# Altium PCB PCM2706_CODEC.PcbDoc
Units mil, origin at the board's own origin, x right, y up, seen from the top; angles counter-clockwise.
Board outline 1377.95 x 1377.95 mil, 2 copper layers (Top Layer, Bottom Layer); 33 components, 23 nets, 108 pads, 24 vias.
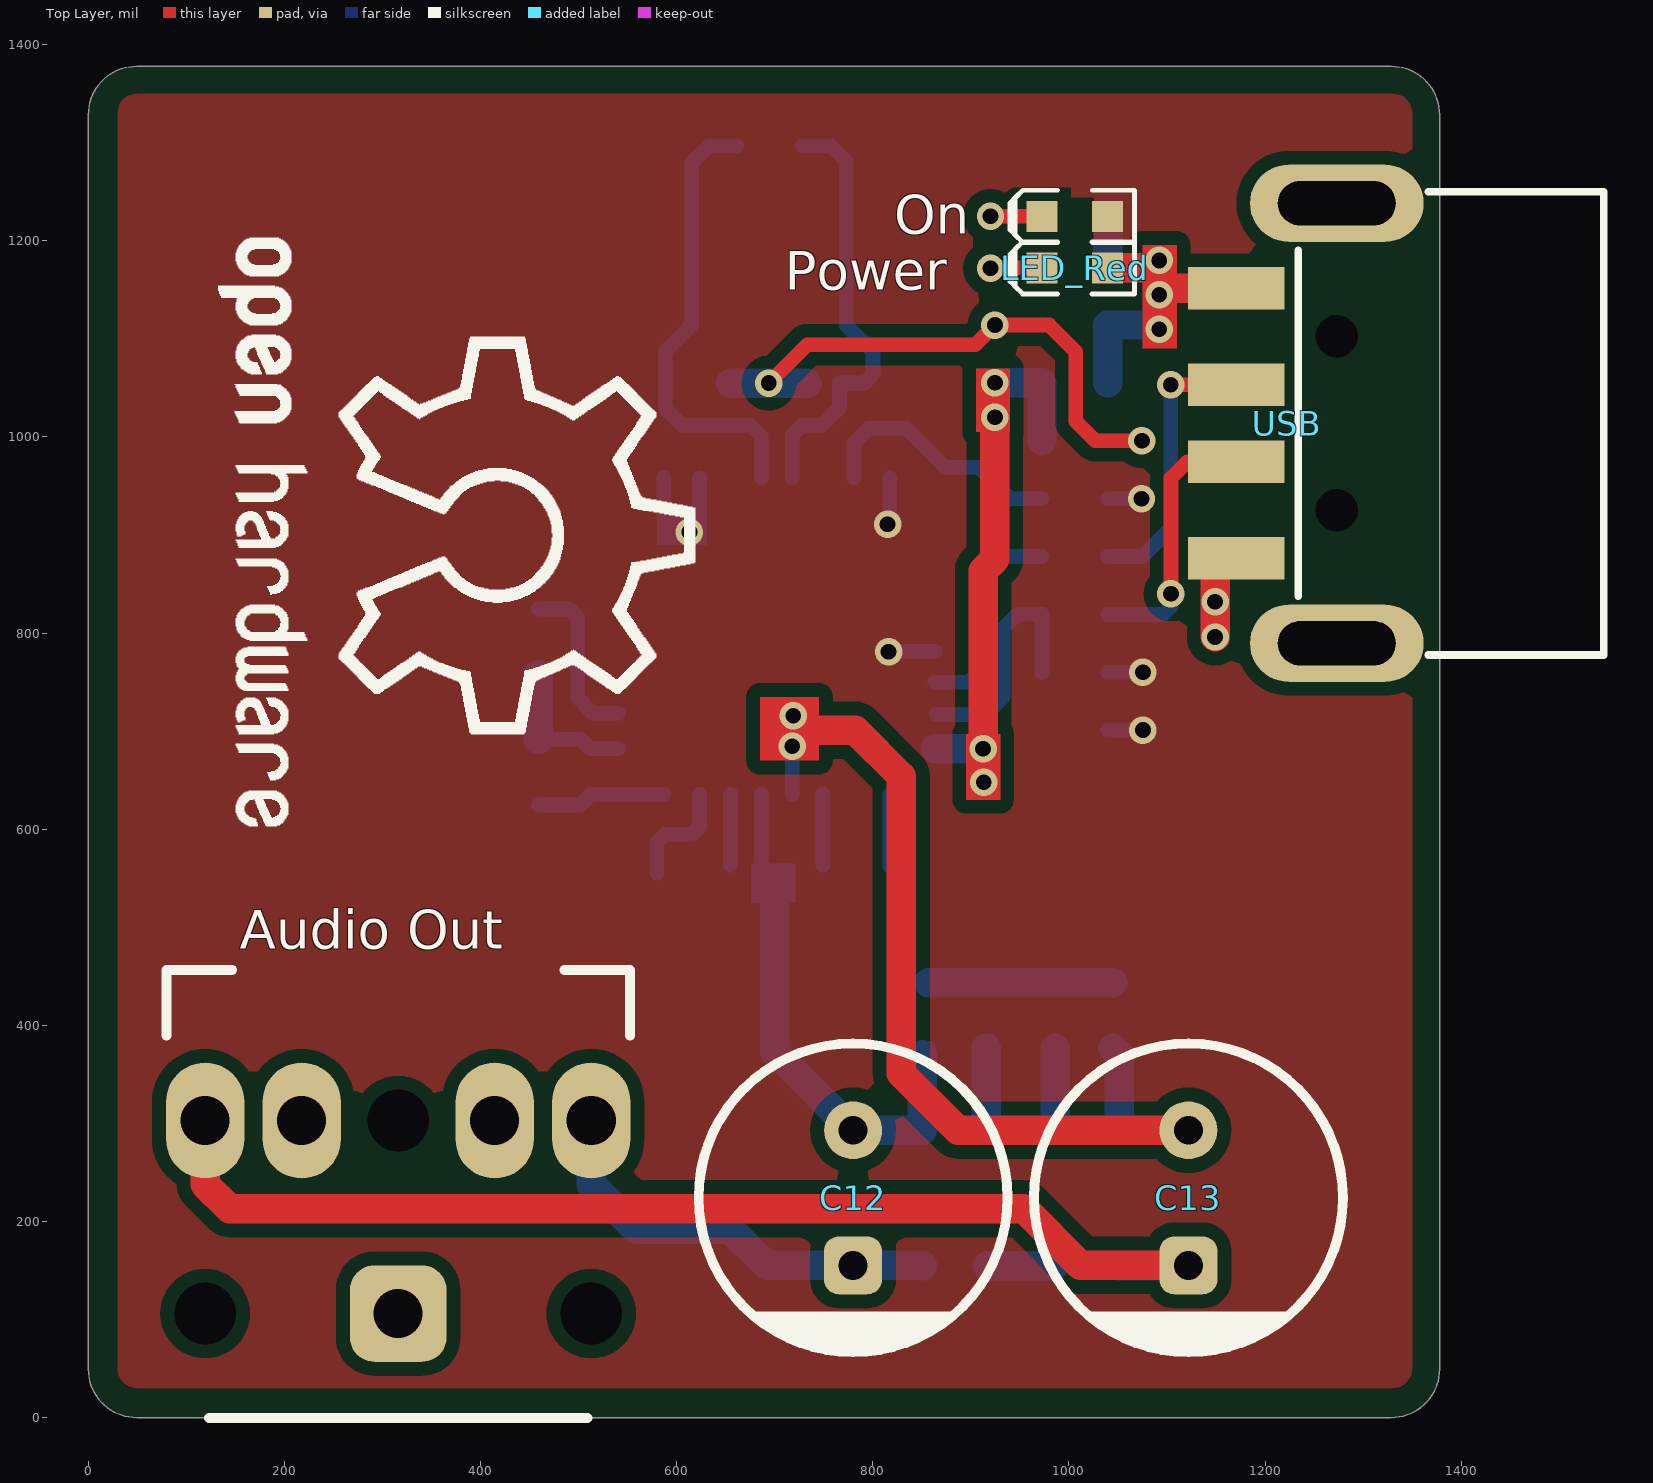
[diagram p0: Top Layer view]
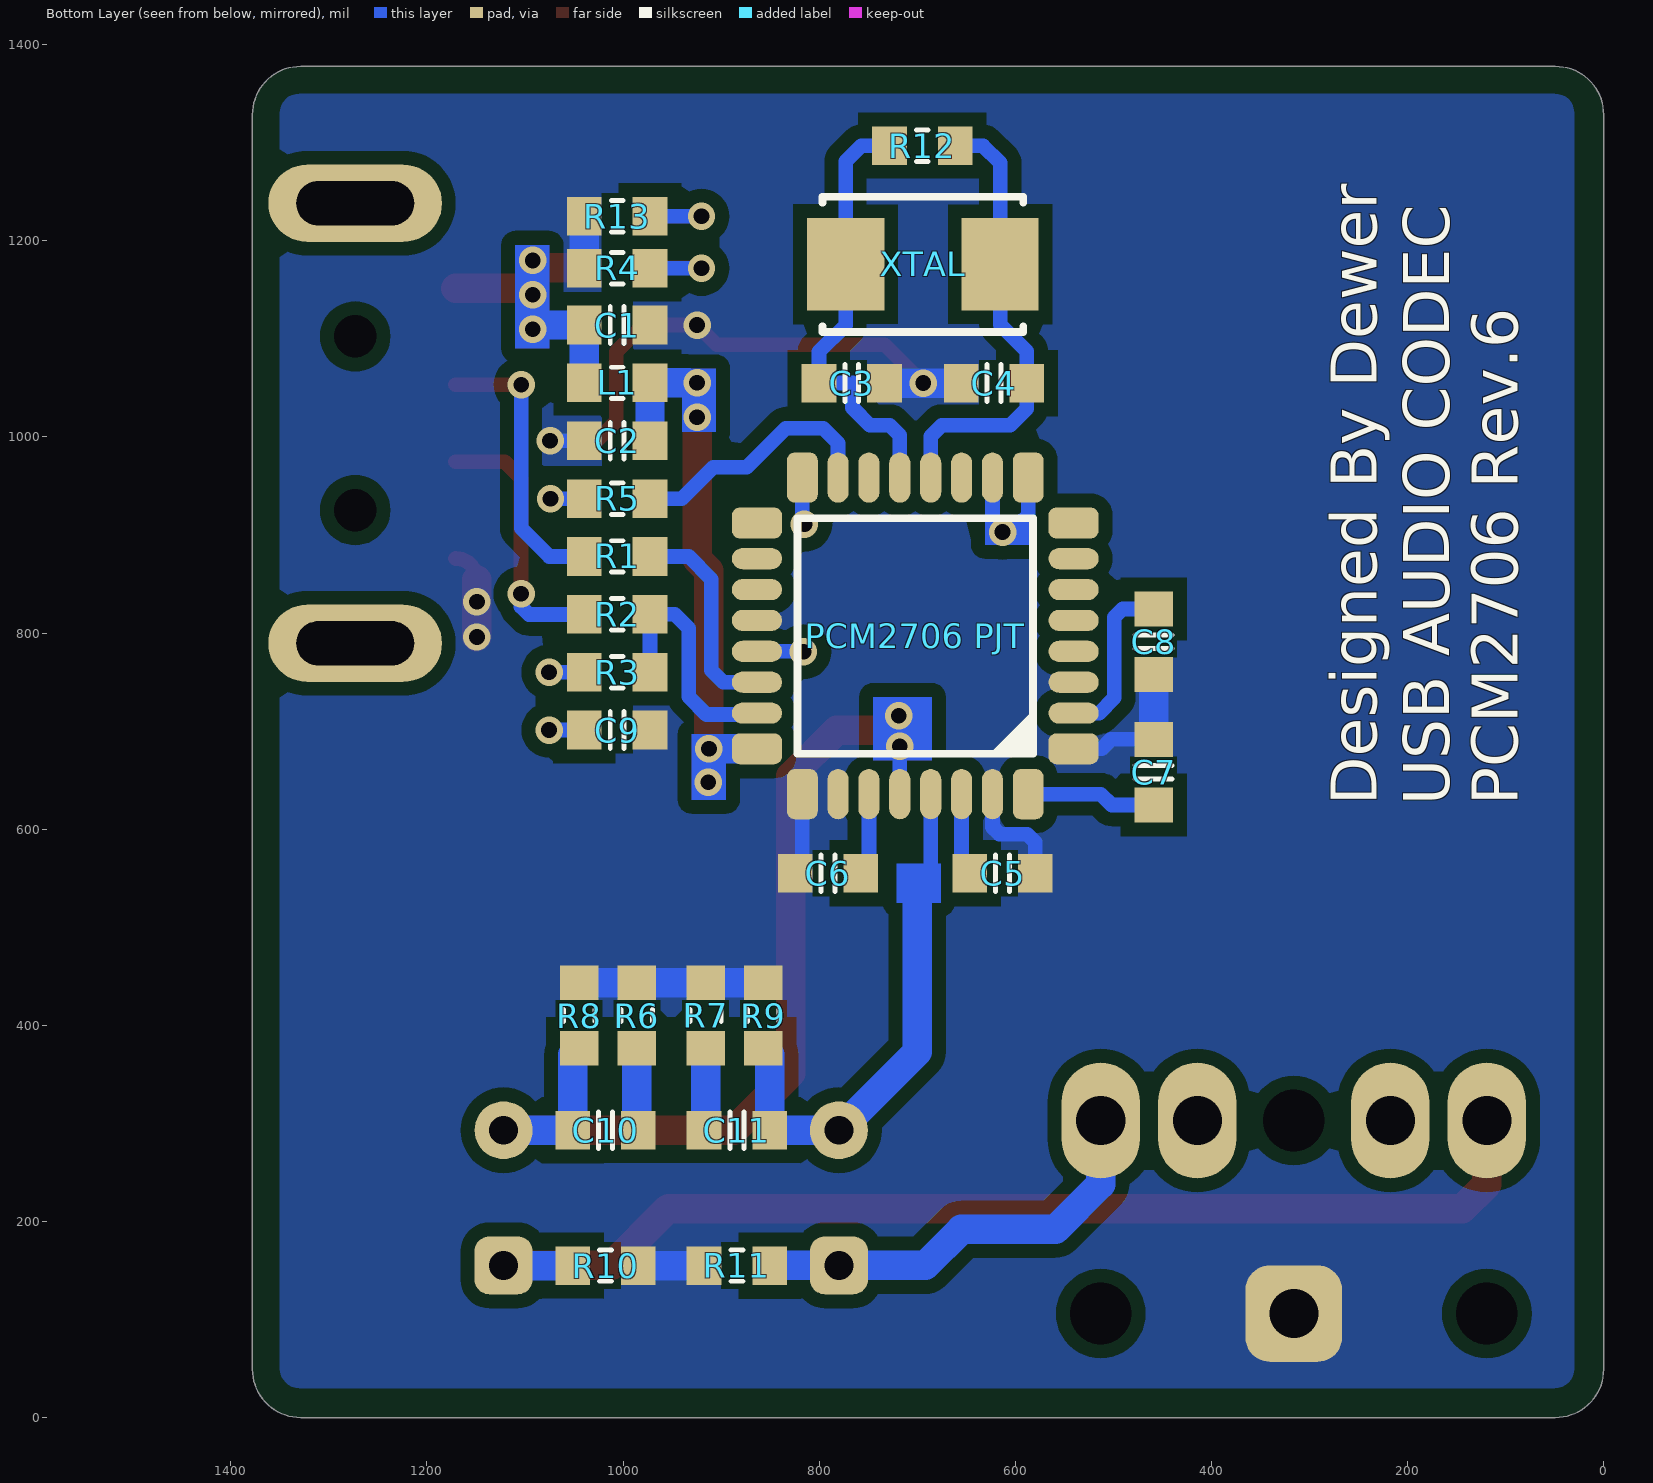
[diagram p1: Bottom Layer view, seen from below]

## Layer stack, top to bottom
Top Layer: signal copper 1.4
Dielectric: dielectric 12.6, FR-4, Dk 4.8
Bottom Layer: signal copper 1.4

## Board outline
1377.95,1328.74 ccw(c1328.74,1328.74) 1328.74,1377.95 49.21,1377.95 ccw(c49.21,1328.74) 0,1328.74 0,49.21 ccw(c49.21,49.21) 49.21,0 1328.74,0 ccw(c1328.74,49.21) 1377.95,49.21

## Design rules (kind name [scope] priority, off if disabled: settings)
Clearance [All] p1: gap=7
PlaneConnect [All] p1: planeconnectstyle=Relief reliefexpansion=10 reliefentries=4 reliefconductorwidth=10 reliefairgap=15
PolygonConnect [All] p1: connectstyle=Direct reliefconductorwidth=10 reliefentries=4 polygonreliefangle="90 Angle" airgapwidth=10
RoutingVias [All] p1: holewidth=28 width=50 viastyle="Through Hole" minholewidth=28 minwidth=50 maxholewidth=28 maxwidth=50
SolderMaskExpansion [All] p1: expansion=0
Width [All] p1: maxlimit=40 minlimit=10 preferedwidth=20 minimp=50.000000 maximp=50.000000 favimp=50.000000
27 further rules are at their usual default settings.

## Components (designator, comment, footprint, x,y, rotation, side; value= is the part's Value field where it differs from the comment)
"Audio Out" "Generic 3.5 PhoneJack 5 Pin through-hole" "3.5 PHONEJACK 5 PIN" 316,106 r270 top (schematic designator J_Audio_Out)
C1 "Cap_0603" CAP_0603 1006,1114.14 r0 bottom
C2 "Cap_0603" CAP_0603 1006,996.14 r180 bottom
C3 "Cap_0603" CAP_0603 766.75,1054.96 r0 bottom
C4 "Cap_0603" CAP_0603 621.75,1054.96 r180 bottom
C5 "1uF" CAP_0603 613,555.14 r0 bottom
C6 "1uF" CAP_0603 791,555.14 r180 bottom
C7 "10uF" CAP_0603 459,658.14 r270 bottom
C8 "1uF" CAP_0603 459,791.14 r270 bottom
C9 "1uF" CAP_0603 1006,701.14 r0 bottom
C10 "0.022uF" CAP_0603 1017.86,293 r0 bottom
C11 "0.022uF" CAP_0603 883.86,293 r180 bottom
C12 "270uF" CAP_ELEC_F3.5_D8_H11.5 779.86,293 r270 top
C13 "270uF" CAP_ELEC_F3.5_D8_H11.5 1121.86,293 r270 top
L1 "Ind_0603" IND_0603 1006,1055.14 r180 bottom
LED_Red "LED_0603_RED" LED_0603_RED 1005.9,1172.44 r180 top
On "LED_0603_RED" LED_0603_RED 1006,1225 r180 top (schematic designator LED_Green)
"PCM2706 PJT" "PCM2706 PJT" TI-S-PQFP-N32 702,797.14 r0 bottom
R1 "Res_0603" RES_0603 1006,878.14 r180 bottom
R2 "Res_0603" RES_0603 1006,819.14 r180 bottom
R3 "Res_0603" RES_0603 1006,760.14 r180 bottom
R4 "1k" RES_0603 1006,1172.14 r0 bottom
R5 "1.5K" RES_0603 1006,937 r180 bottom
R6 "16" RES_0603 985.86,410 r90 bottom
R7 "16" RES_0603 915.86,410 r90 bottom
R8 "3.3K" RES_0603 1044.86,410 r90 bottom
R9 "3.3K" RES_0603 856.86,410 r90 bottom
R10 "3.3K" RES_0603 1017.86,155 r180 bottom
R11 "3.3K" RES_0603 883.86,155 r0 bottom
R12 "Res_0603" RES_0603 694.75,1296.96 r180 bottom
R13 "1k" RES_0603 1006,1225 r0 bottom
USB "USB" USB 1379.45,1013.95 r0 top
XTAL "XTAL_5032" XTAL_5032 694.21,1175.96 r0 bottom

## Footprints (in the part's own frame and the unit in brackets; to place one, negate y for a bottom-side part, rotate by r counter-clockwise, add the part's x,y. Pads: shape width x height; smd on the part's side, far side on the other; paste and mask are expansions set on the pad)
"3.5 PHONEJACK 5 PIN" [mm] "Generic 3.5 PhoneJack 5 Pin  through-hole"
  round 1 hole 1.6: 0(-5,0) 0(0,5) 0(0,-5)
  oval 3x2.032 hole 1.27: Ring_NC(-5,-2.5) Ring_NO(-5,-5) Tip_NC(-5,2.5) Tip_NO(-5,5)
  rrect50% 2.5x2.5 hole 1.27: Sleeve(0,0)
  silkscreen extent -8.9,-6 2.7,6, body extent -8.48,-6 6.52,6, height 10
CAP_0603 [mm] "Chip Capacitor, Body 1.6x0.8mm, 0603, IPC Medium Density"
  rect 0.9x1 smd: 1(-0.85,0) 2(0.85,0)
  Top Layer pour cut-out: -0.4,0.6 0.4,0.6 0.4,-0.6 -0.4,-0.6
  silkscreen extent -0.18,-0.48 0.18,0.48, body extent -0.85,-0.45 0.85,0.45, height 0.89
CAP_ELEC_F3.5_D8_H11.5 [mm] "CAP_ELEC_F3.5_D8_H11.5"
  round 1.5 hole 0.75: 1(0,0)
  rrect50% 1.5x1.5 hole 0.75: 2(3.5,0)
  silkscreen extent -2.25,-4 5.75,4, body extent -2.27,-4.03 5.78,4.03, height 12.03
IND_0603 [mm] "Chip bead, Body 1.6x0.8mm, 0603, IPC Medium Density"
  rect 0.9x1 smd: 1(-0.85,0) 2(0.85,0)
  Top Layer pour cut-out: -0.4,0.6 0.4,0.6 0.4,-0.6 -0.4,-0.6
  silkscreen extent -0.15,-0.41 0.15,0.41, body extent -0.8,-0.4 0.8,0.4, height 0.79
LED_0603_RED [mm] "Chip Capacitor, 2-Leads, Body 1.6x0.8mm, IPC Medium Density"
  rect 0.8x0.8 smd: 1(-0.85,0) 2(0.85,0)
  Top Layer pour cut-out: -0.5,0.5 0.5,0.5 0.5,-0.5 -0.5,-0.5
  silkscreen extent -1.55,-0.67 1.68,0.67, body extent -0.8,-0.4 0.8,0.4, height 0.75
RES_0603 [mm]
  rect 0.9x1 smd: 1(-0.85,0) 2(0.85,0)
  Top Layer pour cut-out: -0.4,0.6 0.4,0.6 0.4,-0.6 -0.4,-0.6
  silkscreen extent -0.15,-0.41 0.15,0.41, body extent -0.87,-0.47 0.88,0.48, height 0.54
TI-S-PQFP-N32 [mm] "TQFP, 32-Leads, Body 7.00x7.00mm, Pitch 0.80mm, IPC High Density"
  rrect50% 1.3x0.8 smd: 1(-4.1,2.925) 8(-4.1,-2.925) 17(4.1,-2.925) 24(4.1,2.925)
  oval 1.3x0.55 smd: 2(-4.1,2) 3(-4.1,1.2) 4(-4.1,0.4) 5(-4.1,-0.4) 6(-4.1,-1.2) 7(-4.1,-2) 18(4.1,-2) 19(4.1,-1.2) 20(4.1,-0.4) 21(4.1,0.4) 22(4.1,1.2) 23(4.1,2)
  rrect50% 0.8x1.3 smd: 9(-2.925,-4.1) 16(2.925,-4.1) 25(2.925,4.1) 32(-2.925,4.1)
  oval 0.55x1.3 smd: 10(-2,-4.1) 11(-1.2,-4.1) 12(-0.4,-4.1) 13(0.4,-4.1) 14(1.2,-4.1) 15(2,-4.1) 26(2,4.1) 27(1.2,4.1) 28(0.4,4.1) 29(-0.4,4.1) 30(-1.2,4.1) 31(-2,4.1)
  silkscreen extent -3.05,-3.05 3.05,3.05, body extent -4.51,-4.5 4.49,4.5, height 1.6
USB [mm] "Connector; USB1.1, Type A, SM; 4 Position; Right Angle"
  round 0.8 hole 1.1: 0(-2.7,-2.25) 0(-2.7,2.25)
  rect 2.5x1.1 smd: 1(-5.3,3.5) 2(-5.3,1) 3(-5.3,-1) 4(-5.3,-3.5)
  oval 4.5x2 hole 1.143 slot 3.048 at 0 deg: 5(-2.7,-5.7) 6(-2.7,5.7)
  silkscreen extent -3.7,-6 4.21,6, body extent -5.3,-6.3 15,6.31, height 3.15
XTAL_5032 [mm] "Molded Capacitor, 2-Leads, Body 5.0x3.2mm, IPC Medium Density"
  rect 2x2.4 smd: 1(-2,0) 2(2,0)
  silkscreen extent -2.6,-1.75 2.6,1.75, body extent -2.5,-1.6 2.5,1.6, height 1

## Part data
C1 C2 C3 C4: "Capacitor"
C5 C6 C7 C8 C9 C10 C11: library part Cap_0603, "Cap_0603"
C12 C13: library part Cap_ELEC_8*11.5*3.5, "Cap_ELEC_8*11.5*3.5"
L1: "Inductor"
LED_Red On: "LED"
"PCM2706 PJT": "PCM2706 USB CODEC"
R1 R2 R3 R12: "Resistor"
R4 R6 R7 R8 R9 R10 R11 R13: library part Res_0603, "Res_0603"
R5: library part Res_0603, "Resistor"
XTAL: "Crystal Oscillator"

## Via types
v1: diameter 28, hole 16, Top Layer to Bottom Layer, 23 vias
v2: diameter 28, hole 16, Top Layer to Bottom Layer, tented top, 1 vias

## Nets (pads, with @x,y where several pads share a name; then routed paths per layer and width w, separated by ;. In a path a pad name is that pad's centre, name@x,y a point inside that pad or via, vN(x,y) a via of type N, cw(c..) or ccw(c..) an arc to the next point about the centre after c; other vN are vias at no path point)
5V: C1.2 L1.1 LED_Red.1 USB.1 | length 233.7
  Top Layer w30: LED_Red.1 1084.44,1172.44 v1(1092,1180) ; v1@1100.25,1151.75 USB.1
  Bottom Layer w30: L1.1 C1.2 v1@1087.86,1114.14
  other v1: 1092,1110 1092,1145
AGND: "Audio Out.Sleeve" "PCM2706 PJT.1" "PCM2706 PJT.3" "PCM2706 PJT.20" "PCM2706 PJT.25" "PCM2706 PJT.26" "PCM2706 PJT.31" C1.1 C2.1 C3.1 C4.1 C5.1 C6.1 C7.1 C8.2 C9.1 R4.2 R6.2 R7.2 R8.2 R9.2 R10.2 R11.2 R13.2 USB.4 | length 1349.1
  Top Layer w15: v1(694,1054.96) 733.04,1094 904.39,1094 v1(924.54,1114.14) 979.86,1114.14 1007,1087 1007,1016 1026.86,996.14 v1(1074.46,996.14) ; 1149,854.37 cw(c1170.79,854.37) USB.4
  Top Layer w30: v1(1149,796) v1(1149,832) 1149,854.37
  Bottom Layer w15: C7.1 502.39,691.61 512.02,681.98 540.58,681.98 ; C5.1 579.54,586.54 588,595 616,595 623.26,602.26 623.26,635.72 ; C6.1@817.16,562.45 817.16,635.72 ; C2.1 v1(1074.46,996.14)
  Bottom Layer w30: C7.1 C8.2 ; C4.1 v1(694,1054.96) C3.1 ; R9.2 R7.2 R6.2 R8.2 ; R11.2 R10.2 ; R4.2 R13.2
D+: "PCM2706 PJT.23" R2.2 R3.2 | length 250
  Bottom Layer w15: 864.82,717 915,717 933,735 933,805 947.14,819.14 R2.2 R3.2
D-: "PCM2706 PJT.22" R1.2 | length 216.7
  Bottom Layer w15: 863.42,749.9 897.9,749.9 910,762 910,855 933.14,878.14 R1.2
DT: "PCM2706 PJT.15" R5.2 | length 263.1
  Bottom Layer w15: 780.74,958.56 780.74,993.74 796,1009 834,1009 874,969 908,969 940,937 R5.2
NetC10_1: C10.1 R6.1 | length 82.1
  Bottom Layer w30: C10.1@985.86,294.46 R6.1
NetC11_1: C11.1 R7.1 | length 82.1
  Bottom Layer w30: C11.1@915.86,294.46 R7.1
NetLED_Green_2: On.2 R13.1 | length 105.1
  Top Layer w15: v1(920,1225) On.2
  Bottom Layer w15: v1(920,1225) R13.1
NetLED_Red_2: LED_Red.2 R4.1 | length 104.4
  Top Layer w15: v1@920.44,1172.44 LED_Red.2
  Bottom Layer w15: v1@920.14,1172.14 R4.1
  other v1: 920,1172
NetR1_1: R1.1 USB.2 | length 289.7
  Top Layer w15: v1(1103.79,1053.32) USB.2
  Bottom Layer w15: R1.1 1075.14,878.14 1103.79,906.79 v1(1103.79,1053.32)
NetR2_1: R2.1 USB.3 | length 272.6
  Top Layer w15: v1(1104,840) 1104,958 1120.58,974.58 USB.3
  Bottom Layer w15: R2.1 1039.61,819 1096,819 1104,827 v1(1104,840)
PHONEL: "Audio Out.Ring_NO" C13.2 R10.1 | length 1172.6
  Top Layer w30: 119.15,302.85 119.15,237.85 144,213 954,213 1011.8,155.2 C13.2
  Bottom Layer w30: R10.1 1121.65,155 C13.2
PHONER: "Audio Out.Tip_NO" C12.2 R11.1 | length 436.7
  Bottom Layer w30: 512.85,302.85 512.85,238.15 559,192 655,192 691.8,155.2 C12.2 850.19,155.2 R11.1
VBUS: "PCM2706 PJT.24" C2.2 L1.2 | length 490.2
  Top Layer w30: v1(912.42,681.98) 912.42,863.42 924.54,875.54 v1(924.54,1020.14)
  Bottom Layer w30: 863.42,681.98 v1(912.42,681.98) ; v1@933.54,1055.14 L1.2 C2.2
  other v1: 924.54,1055.14
  other v2: 913,648
VCCL: "PCM2706 PJT.27" C6.2 | length 72.3
  Bottom Layer w15: C6.2@749.24,563.43 749.24,635.72
VCCP: "PCM2706 PJT.2" C8.1 | length 173.6
  Bottom Layer w15: C8.1 490.39,824.61 499,816 499,734 514.6,718.4 540.58,718.4
VCCR: "PCM2706 PJT.30" C5.2 | length 72.3
  Bottom Layer w15: C5.2@654.76,563.43 654.76,635.72
VCOM: "PCM2706 PJT.32" C7.2 | length 132.4
  Bottom Layer w15: C7.2 501.68,624.68 512.72,635.72 586.84,635.72
VDD: "PCM2706 PJT.9" "PCM2706 PJT.10" "PCM2706 PJT.16" "PCM2706 PJT.21" C9.2 On.1 R3.1 R5.1 | length 327
  Bottom Layer w15: 586.84,958.56 586.84,920.16 594.74,912.26 623.26,912.26 623.26,958.56 ; v1(815,911) 817.16,913.16 817.16,958.56 ; v1(816,781) 816.39,781.39 863.42,781.39 ; C9.2 v1(1075.46,701.14) ; R3.1 v1(1075.46,760.14) ; R5.1 v1(1074,937)
  other v1: 613,903
VOUTL: "PCM2706 PJT.28" C10.2 C13.1 R8.1 | length 956.1
  Top Layer w30: 713,701 782,701 829,654 829,351 887,293 C13.1
  Bottom Layer w15: 717.75,635.72 v1@717.75,679.75
  Bottom Layer w30: R8.1 1051.32,370.07 C10.2 C13.1
  other v1: 717.75,684.75 718.75,715.75
VOUTR: "PCM2706 PJT.29" C11.2 C12.1 R9.1 | length 541.6
  Bottom Layer w15: 686.25,535 686.25,635.72 ; R9.1@850.39,370.07 R9.1
  Bottom Layer w30: 700,544 700,372.86 C12.1 C11.2 R9.1@850.39,370.07
XTI: "PCM2706 PJT.12" C4.2 R12.2 XTAL.1 | length 466.8
  Bottom Layer w15: R12.2 632.96,1296.96 615.47,1279.47 XTAL.1 615.47,1114.47 588.28,1087.28 C4.2 588.28,1028.72 605,1012 675,1012 686.25,1000.75 686.25,958.56
XTO: "PCM2706 PJT.13" C3.2 R12.1 XTAL.2 | length 445.9
  Bottom Layer w15: 717.75,958.56 717.75,1001.75 728,1012 748.23,1012 766,1029.77 766,1054.96 791.19,1054.96 800.21,1063.98 800.21,1086.79 772.95,1114.05 XTAL.2 772.95,1281.05 757.04,1296.96 R12.1
pads on no net: "Audio Out.0" "Audio Out.Ring_NC" "Audio Out.Tip_NC" "PCM2706 PJT.4" "PCM2706 PJT.5" "PCM2706 PJT.6" "PCM2706 PJT.7" "PCM2706 PJT.8" "PCM2706 PJT.11" "PCM2706 PJT.14" "PCM2706 PJT.17" "PCM2706 PJT.18" "PCM2706 PJT.19" USB.0 USB.5 USB.6

## Polygon pours and split planes (outlines as drawn)
AGND on Bottom Layer "Bottom Layer-GND" (solid, remove dead copper, pour order 8): 1330,30 ccw(c1330,50) 1350,50 1350,1330 ccw(c1330,1330) 1330,1350 50,1350 ccw(c50,1330) 30,1330 30,50 ccw(c50,50) 50,30
VDD on Top Layer "TopLayer-VDD" (solid, remove dead copper, pour order 10): 1330,30 ccw(c1330,50) 1350,50 1350,1330 ccw(c1330,1330) 1330,1350 50,1350 ccw(c50,1330) 30,1330 30,50 ccw(c50,50) 50,30

## Other copper
Top Layer:
  rectangle net VOUTL: 685,670 745,735
  rectangle net 5V: 1075,1090 1110,1196
  rectangle net VBUS: 905,1005 940,1070
  rectangle net VBUS: 895,630 930,697
Bottom Layer:
  rectangle net VOUTL: 685,670 745,735
  rectangle net VOUTR: 676,525 721,565
  rectangle net 5V: 1075,1090 1110,1196
  rectangle net VBUS: 895,630 930,697
  rectangle net VBUS: 905,1005 940,1070
  rectangle net VDD: 580,890 631,920

## Silkscreen, mask and mechanical layers (free items; w line width, h text height)
Top Overlay:
  drawing of 2479 lines, arcs and shapes, not listed
  text "Power" at 710,1150 h39.37
Bottom Overlay:
  text "PCM2706 Rev.6" at 72.1,624.35 h80 r270
  text "USB AUDIO CODEC" at 142.4,624.35 h80 r270
  text "Designed By Dewer" at 216,624.35 h80 r270
Mechanical 13:
  lines w5: 0,49.21 ccw(c49.21,49.21) 49.21,0 ; 0,49.21 ccw(c-19.69,49.21) -19.69,68.9 ccw(c-19.69,49.21) -39.37,49.21 ccw(c49.21,49.21) 49.21,-39.37 ccw(c49.21,-19.68) 68.9,-19.68 ccw(c49.21,-19.68) 49.21,0 ; 0,49.21 0,1328.74 ; 0,1328.74 cw(c49.21,1328.74) 49.21,1377.95 ; 0,1328.74 cw(c-19.68,1328.74) -19.68,1309.06 cw(c-19.68,1328.74) -39.37,1328.74 cw(c49.21,1328.74) 49.21,1417.32 cw(c49.21,1397.64) 68.9,1397.64 cw(c49.21,1397.64) 49.21,1377.95 ; 0,1328.74 cw(c49.21,1328.74) 49.21,1377.95 ; 49.21,0 1328.74,0 ; 49.21,1377.95 1328.74,1377.95 ; 1328.74,0 ccw(c1328.74,49.21) 1377.95,49.21 ; 1328.74,0 ccw(c1328.74,-19.69) 1309.06,-19.69 ccw(c1328.74,-19.69) 1328.74,-39.37 ccw(c1328.74,49.21) 1417.32,49.21 ccw(c1397.64,49.21) 1397.64,68.9 ccw(c1397.64,49.21) 1377.95,49.21 ; 1328.74,0 ccw(c1328.74,49.21) 1377.95,49.21 ; 1328.74,1377.95 cw(c1328.74,1328.74) 1377.95,1328.74 ; 1328.74,1377.95 cw(c1328.74,1397.64) 1309.06,1397.64 cw(c1328.74,1397.64) 1328.74,1417.32 cw(c1328.74,1328.74) 1417.32,1328.74 cw(c1397.64,1328.74) 1397.64,1309.06 cw(c1397.64,1328.74) 1377.95,1328.74 ; 1328.74,1377.95 cw(c1328.74,1328.74) 1377.95,1328.74 ; 1328.74,1377.95 1328.74,1377.95 ; 1377.95,49.21 1377.95,1328.74